# Altium PCB KNX-RELAY-24CH_V1.2.PcbDoc (part 2 of 2)
Units mm, origin at the board's own origin, x right, y up, seen from the top; angles counter-clockwise.
Board outline 85 x 205.5 mm, 2 copper layers (F.Cu, B.Cu); 269 components, 236 nets, 839 pads, 840 vias.
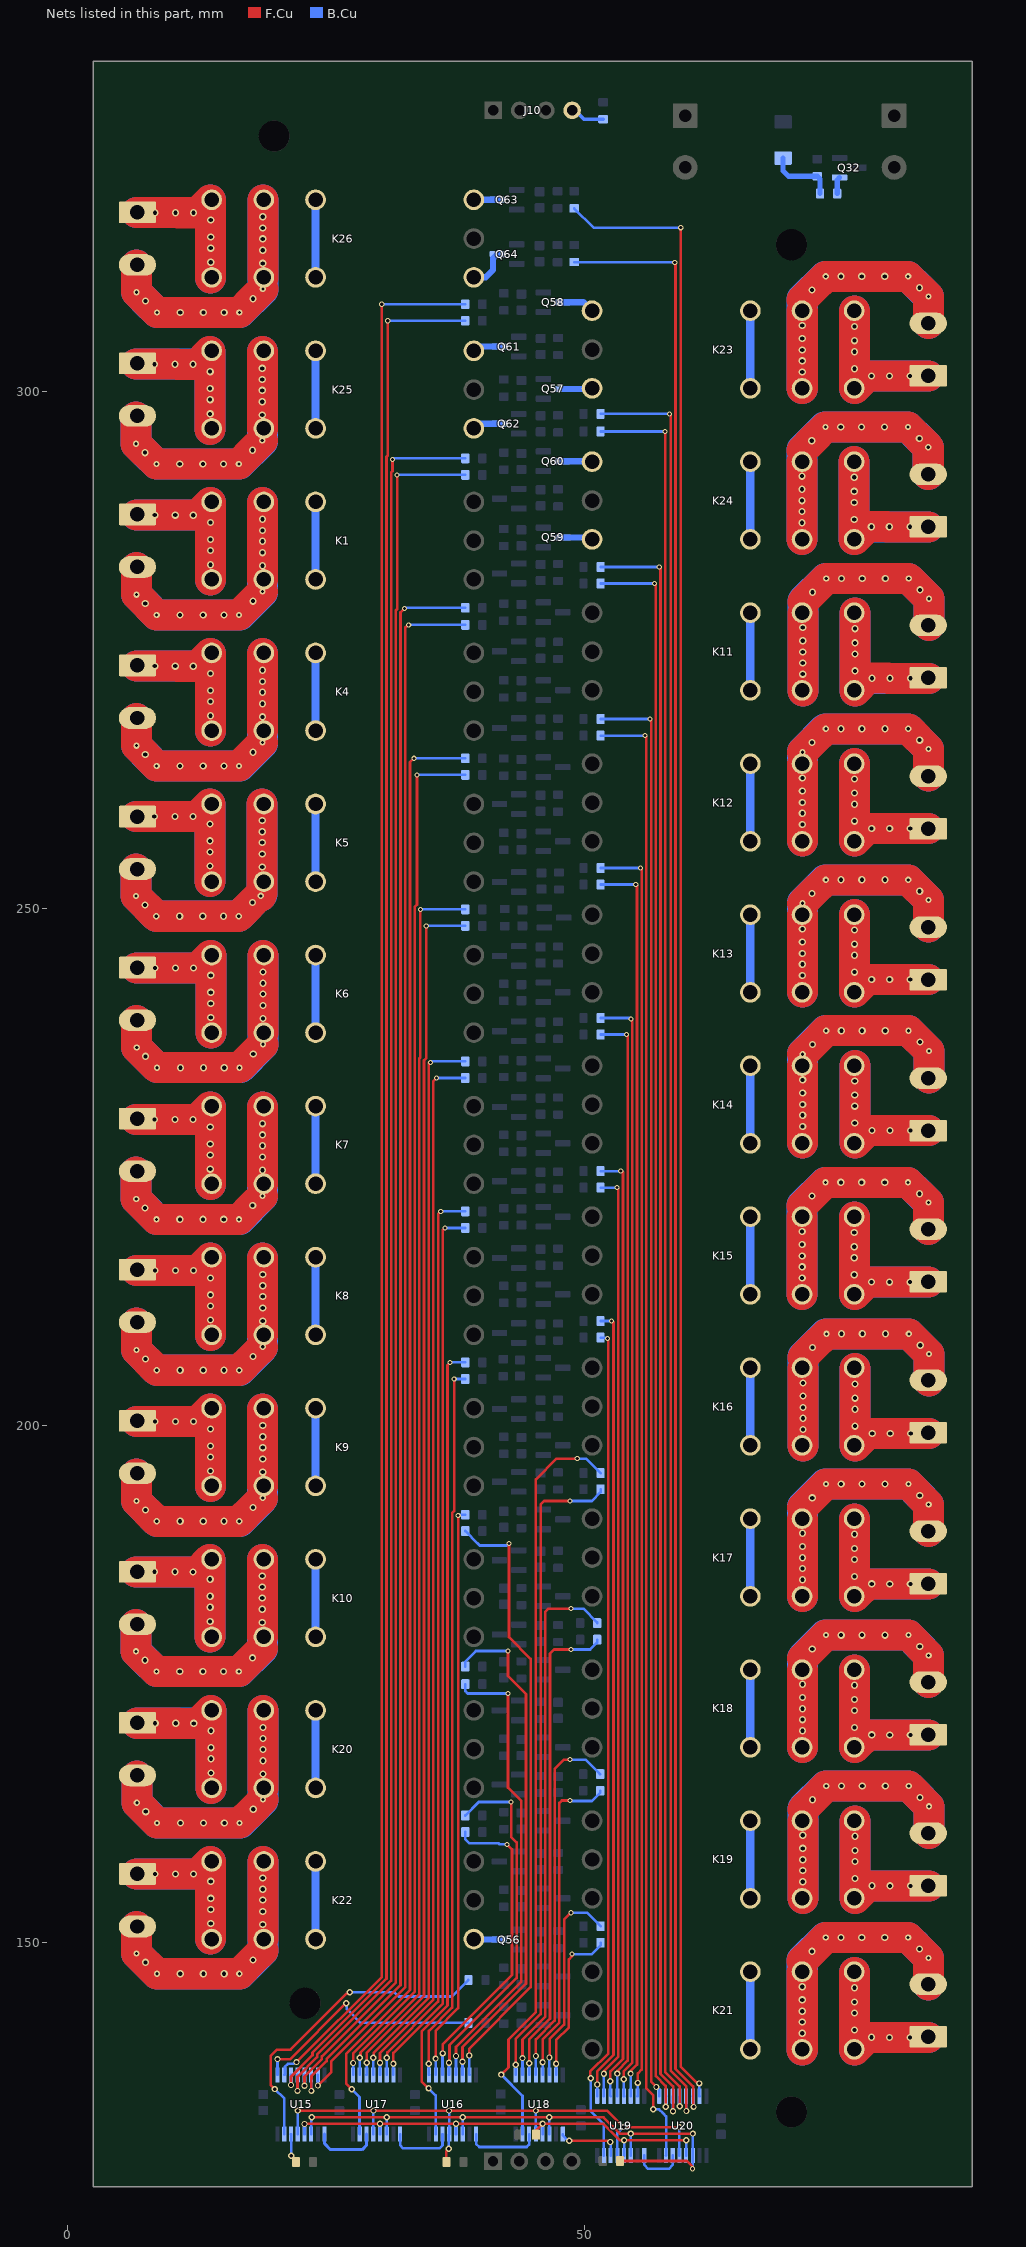
[diagram p2: the nets of this part, all layers, seen from the top]

## Via types
v1: diameter 0.7, hole 0.4, F.Cu to B.Cu, tented both sides, 417 vias
v2: diameter 0.5, hole 0.3, F.Cu to B.Cu, tented both sides, 173 vias
v3: diameter 0.6, hole 0.35, F.Cu to B.Cu, tented both sides, 165 vias
v4: diameter 0.6, hole 0.3, F.Cu to B.Cu, tented both sides, 85 vias

## Nets (pads, with @x,y where several pads share a name; then routed paths per layer and width w, separated by ;. In a path a pad name is that pad's centre, name@x,y a point inside that pad or via, vN(x,y) a via of type N, cw(c..) or ccw(c..) an arc to the next point about the centre after c; other vN are vias at no path point) (continued)
NetK22_A2: K22.A2 Q56.3 | length 2.5
  B.Cu w0.6: K22.A2@39.298,150.35 39.358,150.29 Q56.3@41.761,150.29
NetK23_A1: K23.A1 Q57.3 | length 2.9
  B.Cu w0.6: Q57.3@47.896,300.2 50.668,300.2 K23.A1@50.728,300.26
NetK23_A2: K23.A2 Q58.3 | length 3.2
  B.Cu w0.6: Q58.3@47.896,308.58 49.908,308.58 K23.A2@50.728,307.76
NetK24_A1: K24.A1 Q59.3 | length 2.9
  B.Cu w0.6: Q59.3@47.896,285.84 50.551,285.84 K24.A1@50.728,285.663
NetK24_A2: K24.A2 Q60.3 | length 2.9
  B.Cu w0.6: Q60.3@47.896,293.22 50.671,293.22 K24.A2@50.728,293.163
NetK25_A1: K25.A1 Q61.3 | length 2.6
  B.Cu w0.6: K25.A1@39.298,303.886 39.712,304.3 Q61.3@41.761,304.3
NetK25_A2: K25.A2 Q62.3 | length 2.6
  B.Cu w0.6: K25.A2@39.298,296.386 39.742,296.83 Q62.3@41.761,296.83
NetK26_A1: K26.A1 Q63.3 | length 2.3
  B.Cu w0.6: K26.A1@39.298,318.49 Q63.3@41.571,318.49
NetK26_A2: K26.A2 Q64.3 | length 3.9
  B.Cu w0.6: K26.A2@39.298,310.99 40.448,310.99 41.148,311.69 41.148,312.807 Q64.3@41.571,313.23
NetQ32_1: Q32.1 R85.1 | length 1.6
  B.Cu w0.5: R85.1@74.423,319.09 74.423,320.402 Q32.1@74.661,320.64
NetR84_2: R84.2 R85.2 Z2.2 | length 6.5
  B.Cu w0.5: Z2.2@69.198,322.517 69.198,321.29 69.723,320.765 R84.2@72.498,320.765 72.773,320.49 R85.2@72.773,319.09
NetU15_9: U15.9 U17.14 | length 6.5
  B.Cu w0.3: U15.9@24.873,131.49 24.873,130.565 25.448,129.99 28.498,129.99 28.923,130.415 U17.14@28.923,131.49
NetU16_9: U16.9 U18.14 | length 7.3
  B.Cu w0.254: U16.9@39.523,131.49 39.523,130.54 39.823,130.24 44.398,130.24 44.648,130.49 U18.14@44.648,131.49
NetU16_14: U16.14 U17.9 | length 6.5
  B.Cu w0.254: U17.9@32.173,131.49 32.173,130.415 32.473,130.115 35.998,130.115 36.273,130.39 U16.14@36.273,131.49
NetU18_9: U18.9 U19.14 | length 6.3
  F.Cu w0.254: v3(48.523,130.84) 52.373,130.84 v3(52.486,130.727)
  B.Cu w0.254: U18.9@47.898,131.49 47.898,131.365 48.423,130.84 v3(48.523,130.84) ; v3(52.486,130.727) 52.523,130.69 U19.14@52.523,129.427
NetU19_9: U19.9 U20.14 | length 4.9
  B.Cu w0.254: U19.9@55.773,129.427 55.773,128.515 56.148,128.14 58.148,128.14 58.523,128.515 U20.14@58.523,129.427
R1_A1: R34.2 U15.5 | length 167.1
  F.Cu w0.254: v3(22.923,136.165) 22.923,137.052 24.613,138.742 24.613,138.987 31.76,146.134 31.76,278.794 31.883,278.917 v2(31.883,291.89)
  B.Cu w0.254: v3(22.923,136.165) U15.5@22.923,137.215 ; v2(31.883,291.89) R34.2@38.473,291.89
R1_A2: R33.2 U20.2 | length 153.9
  F.Cu w0.254: v2(56.767,281.39) 56.89,281.267 56.89,137.54 56.89,137.098 57.848,136.14 v3(57.848,134.14)
  B.Cu w0.254: R33.2@51.553,281.39 v2(56.767,281.39) ; v3(57.848,134.14) 57.848,135.127 U20.2@57.873,135.152
R1_COM: J1.2 K1.11 | length 51
  F.Cu w3: J1.2@6.678,282.92 v4(6.678,280.313) v4(8.638,278.353) v4(16.608,278.353) v1(17.938,279.683) v4(18.878,280.623) ; K1.11@18.878,281.71 K1.11@18.878,289.21
  B.Cu w3: J1.2@6.678,282.92 v4(6.678,280.313) ; 7.938,279.043 7.938,279.053 v4(6.678,280.313) ; K1.11@18.878,289.21 v1(18.878,287.603) v1(18.878,286.523) v1(18.878,285.473) v1(18.878,284.373) v1(18.878,283.103) 18.878,281.71 v4(18.878,280.623) 18.878,280.543 16.688,278.353 v4(16.608,278.353) v1(15.138,278.353) v1(13.128,278.353) v1(10.898,278.353) v4(8.638,278.353) v1(7.538,279.453) v4(6.678,280.313)
R1_NC: K1.12 | length 7.5
  B.Cu w0.8: K1.12@23.998,281.783 K1.12@23.998,289.283
R1_NO: J1.1 K1.14 | length 30.3
  F.Cu w3: J1.1@6.678,288 10.651,288 10.658,287.993 v1(12.178,287.993) 12.568,287.993 13.785,289.21 13.838,289.21 K1.14@13.838,281.71
  B.Cu w3: J1.1@6.678,288 v1(8.448,288) v1(10.438,288) 12.628,288 13.838,289.21 v1(13.838,287.283) v1(13.838,285.643) v1(13.838,284.573) v1(13.838,283.203) K1.14@13.838,281.71
R2_A1: R57.2 U15.7 | length 151.4
  F.Cu w0.254: v3(24.223,136.19) 25.521,137.488 25.521,138.549 32.668,145.696 32.668,277.16 32.898,277.39 v2(32.998,277.39)
  B.Cu w0.254: v3(24.223,136.19) U15.7@24.223,137.215 ; v2(32.998,277.39) R57.2@38.473,277.39
R2_A2: R56.2 U20.15 | length 142.8
  F.Cu w0.254: v2(55.859,266.69) 55.982,266.567 55.982,135.906 56.648,135.24 v3(56.648,133.89)
  B.Cu w0.254: R56.2@51.553,266.69 v2(55.859,266.69) ; v3(56.648,133.89) 57.221,133.89 57.221,133.88 57.588,133.513 57.6,133.513 57.898,133.215 57.898,129.452 U20.15@57.873,129.427
R2_COM: J2.2 K4.11 | length 51
  F.Cu w3: J2.2@6.678,268.32 v4(6.678,265.713) v4(8.638,263.753) v4(16.608,263.753) v1(17.938,265.083) v4(18.878,266.023) ; K4.11@18.878,267.11 K4.11@18.878,274.61
  B.Cu w3: J2.2@6.678,268.32 v4(6.678,265.713) ; 7.938,264.443 7.938,264.453 v4(6.678,265.713) ; K4.11@18.878,274.61 v1(18.878,273.003) v1(18.878,271.923) v1(18.878,270.873) v1(18.878,269.773) v1(18.878,268.503) 18.878,267.11 v4(18.878,266.023) 18.878,265.943 16.688,263.753 v4(16.608,263.753) v1(15.138,263.753) v1(13.128,263.753) v1(10.898,263.753) v4(8.638,263.753) v1(7.538,264.853) v4(6.678,265.713)
R2_NC: K4.12 | length 7.5
  B.Cu w0.8: K4.12@23.998,267.179 K4.12@23.998,274.679
R2_NO: J2.1 K4.14 | length 30.3
  F.Cu w3: J2.1@6.678,273.4 10.651,273.4 10.658,273.393 v1(12.178,273.393) 12.568,273.393 13.785,274.61 13.838,274.61 K4.14@13.838,267.11
  B.Cu w3: J2.1@6.678,273.4 v1(8.448,273.4) v1(10.438,273.4) 12.628,273.4 13.838,274.61 v1(13.838,272.683) v1(13.838,271.043) v1(13.838,269.973) v1(13.838,268.603) K4.14@13.838,267.11
R3_A1: R61.2 U17.1 | length 132.9
  F.Cu w0.254: v3(27.623,138.365) 27.623,139.281 33.576,145.234 33.576,250.129 33.798,250.351 v2(33.798,262.89)
  B.Cu w0.254: U17.1@27.623,137.215 v3(27.623,138.365) ; v2(33.798,262.89) R61.2@38.473,262.89
R3_A2: R60.2 U19.6 | length 120.9
  F.Cu w0.254: v3(54.45,137.337) 54.45,137.582 55.074,138.206 55.074,252.167 v2(54.951,252.29)
  B.Cu w0.254: R60.2@51.553,252.29 v2(54.951,252.29) ; v3(54.45,137.337) 54.45,135.175 U19.6@54.473,135.152
R3_COM: J3.2 K5.11 | length 51.2
  F.Cu w3: J3.2@6.638,253.79 v4(6.638,251.183) v4(8.598,249.223) v1(10.858,249.223) v1(13.088,249.223) v1(15.098,249.223) v4(16.568,249.223) 18.838,251.493 v1(18.838,255.243) v1(18.838,256.343) v1(18.838,257.393) v1(18.838,258.473) K5.11@18.838,260.08 ; v4@18.623,251.277 v4(18.7,251.2)
  B.Cu w3: J3.2@6.638,253.79 v4(6.638,251.183) ; 7.898,249.913 7.898,249.923 v4(6.638,251.183) ; v1(17.898,250.553) v4(16.568,249.223) v1(15.098,249.223) v1(13.088,249.223) v1(10.858,249.223) v4(8.598,249.223) v1(7.498,250.323) v4(6.638,251.183) ; v4(18.7,251.2) 18.838,251.338 K5.11@18.838,260.08
  other v1: 18.838,253.973
R3_NC: K5.12 | length 7.5
  B.Cu w0.8: K5.12@23.998,252.575 K5.12@23.998,260.075
R3_NO: J3.1 K5.14 | length 30.3
  F.Cu w3: J3.1@6.638,258.87 10.611,258.87 10.618,258.863 v1(12.138,258.863) 12.528,258.863 13.745,260.08 13.798,260.08 K5.14@13.798,252.58
  B.Cu w3: J3.1@6.638,258.87 v1(8.408,258.87) v1(10.398,258.87) 12.588,258.87 13.798,260.08 v1(13.798,258.153) v1(13.798,256.513) v1(13.798,255.443) v1(13.798,254.073) K5.14@13.798,252.58
R4_A1: R65.2 U17.3 | length 117.2
  F.Cu w0.254: v3(28.936,138.381) 28.936,139.31 34.484,144.858 34.484,235.292 34.698,235.506 v2(34.698,248.29)
  B.Cu w0.254: U17.3@28.923,137.215 28.936,137.228 v3(28.936,138.381) ; v2(34.698,248.29) R65.2@38.473,248.29
R4_A2: R64.2 U19.4 | length 105.6
  F.Cu w0.254: v3(53.17,137.341) 53.17,137.586 54.166,138.582 54.166,237.667 v2(54.043,237.79)
  B.Cu w0.254: R64.2@51.553,237.79 v2(54.043,237.79) ; v3(53.17,137.341) 53.17,135.155 U19.4@53.173,135.152
R4_COM: J4.2 K6.11 | length 51
  F.Cu w3: J4.2@6.708,239.147 v4(6.708,236.54) v4(8.668,234.58) v4(16.638,234.58) v1(17.968,235.91) v4(18.908,236.85) ; K6.11@18.908,237.937 K6.11@18.908,245.437
  B.Cu w3: J4.2@6.708,239.147 v4(6.708,236.54) ; 7.968,235.27 7.968,235.28 v4(6.708,236.54) ; K6.11@18.908,245.437 v1(18.908,243.83) v1(18.908,242.75) v1(18.908,241.7) v1(18.908,240.6) v1(18.908,239.33) 18.908,237.937 v4(18.908,236.85) 18.908,236.77 16.718,234.58 v4(16.638,234.58) v1(15.168,234.58) v1(13.158,234.58) v1(10.928,234.58) v4(8.668,234.58) v1(7.568,235.68) v4(6.708,236.54)
R4_NC: K6.12 | length 7.5
  B.Cu w0.8: K6.12@23.998,237.972 K6.12@23.998,245.472
R4_NO: J4.1 K6.14 | length 30.3
  F.Cu w3: J4.1@6.708,244.227 10.681,244.227 10.688,244.22 v1(12.208,244.22) 12.598,244.22 13.815,245.437 13.868,245.437 K6.14@13.868,237.937
  B.Cu w3: J4.1@6.708,244.227 v1(8.478,244.227) v1(10.468,244.227) 12.658,244.227 13.868,245.437 v1(13.868,243.51) v1(13.868,241.87) v1(13.868,240.8) v1(13.868,239.43) K6.14@13.868,237.937
R5_A1: R69.2 U17.5 | length 101.4
  F.Cu w0.254: v3(30.223,138.39) 30.223,139.313 35.392,144.482 35.392,233.284 v2(35.698,233.59)
  B.Cu w0.254: U17.5@30.223,137.215 v3(30.223,138.39) ; v2(35.698,233.59) R69.2@38.473,233.59
R5_A2: R68.2 U19.2 | length 90
  F.Cu w0.254: v3(51.867,137.322) 51.867,137.567 53.258,138.958 53.258,222.867 v2(53.135,222.99)
  B.Cu w0.254: R68.2@51.553,222.99 v2(53.135,222.99) ; v3(51.867,137.322) 51.867,135.158 U19.2@51.873,135.152
R5_COM: J5.2 K7.11 | length 51
  F.Cu w3: J5.2@6.658,224.49 v4(6.658,221.883) v4(8.618,219.923) v4(16.588,219.923) v1(17.918,221.253) v4(18.858,222.193) ; K7.11@18.858,223.28 K7.11@18.858,230.78
  B.Cu w3: J5.2@6.658,224.49 v4(6.658,221.883) ; 7.918,220.613 7.918,220.623 v4(6.658,221.883) ; K7.11@18.858,230.78 v1(18.858,229.173) v1(18.858,228.093) v1(18.858,227.043) v1(18.858,225.943) v1(18.858,224.673) 18.858,223.28 v4(18.858,222.193) 18.858,222.113 16.668,219.923 v4(16.588,219.923) v1(15.118,219.923) v1(13.108,219.923) v1(10.878,219.923) v4(8.618,219.923) v1(7.518,221.023) v4(6.658,221.883)
R5_NC: K7.12 | length 7.5
  B.Cu w0.8: K7.12@23.998,223.368 K7.12@23.998,230.868
R5_NO: J5.1 K7.14 | length 30.3
  F.Cu w3: J5.1@6.658,229.57 10.631,229.57 10.638,229.563 v1(12.158,229.563) 12.548,229.563 13.765,230.78 13.818,230.78 K7.14@13.818,223.28
  B.Cu w3: J5.1@6.658,229.57 v1(8.428,229.57) v1(10.418,229.57) 12.608,229.57 13.818,230.78 v1(13.818,228.853) v1(13.818,227.213) v1(13.818,226.143) v1(13.818,224.773) K7.14@13.818,223.28
R6_A1: R73.2 U17.7 | length 85.9
  F.Cu w0.254: v3(31.523,138.29) 31.523,139.329 36.3,144.106 36.3,218.892 v2(36.498,219.09)
  B.Cu w0.254: U17.7@31.523,137.215 v3(31.523,138.29) ; v2(36.498,219.09) R73.2@38.473,219.09
R6_A2: R72.2 U19.15 | length 81
  F.Cu w0.254: v3(50.596,136.893) 50.548,136.941 50.548,137.54 52.298,139.29 52.298,208.319 v2(52.227,208.39)
  B.Cu w0.254: v3(50.596,136.893) 50.596,133.742 51.848,132.49 51.848,129.452 U19.15@51.873,129.427 ; R72.2@51.553,208.49 52.127,208.49 v2(52.227,208.39)
R6_COM: J6.2 K8.11 | length 51
  F.Cu w3: J6.2@6.688,209.9 v4(6.688,207.293) v4(8.648,205.333) v4(16.618,205.333) v1(17.948,206.663) v4(18.888,207.603) ; K8.11@18.888,208.69 K8.11@18.888,216.19
  B.Cu w3: J6.2@6.688,209.9 v4(6.688,207.293) ; 7.948,206.023 7.948,206.033 v4(6.688,207.293) ; K8.11@18.888,216.19 v1(18.888,214.583) v1(18.888,213.503) v1(18.888,212.453) v1(18.888,211.353) v1(18.888,210.083) 18.888,208.69 v4(18.888,207.603) 18.888,207.523 16.698,205.333 v4(16.618,205.333) v1(15.148,205.333) v1(13.138,205.333) v1(10.908,205.333) v4(8.648,205.333) v1(7.548,206.433) v4(6.688,207.293)
R6_NC: K8.12 | length 7.5
  B.Cu w0.8: K8.12@23.998,208.764 K8.12@23.998,216.264
R6_NO: J6.1 K8.14 | length 30.3
  F.Cu w3: J6.1@6.688,214.98 10.661,214.98 10.668,214.973 v1(12.188,214.973) 12.578,214.973 13.795,216.19 13.848,216.19 K8.14@13.848,208.69
  B.Cu w3: J6.1@6.688,214.98 v1(8.458,214.98) v1(10.448,214.98) 12.638,214.98 13.848,216.19 v1(13.848,214.263) v1(13.848,212.623) v1(13.848,211.553) v1(13.848,210.183) K8.14@13.848,208.69
R7_A1: R77.2 U16.1 | length 69.4
  F.Cu w0.254: v3(34.948,138.29) 34.948,141.47 37.208,143.73 37.208,191.529 37.398,191.719 v2(37.398,204.49)
  B.Cu w0.254: v3(34.948,138.29) 34.948,137.24 U16.1@34.973,137.215 ; v2(37.398,204.49) R77.2@38.473,204.49
R7_A2: R76.2 U18.1 | length 62.7
  F.Cu w0.254: v3(43.348,138.19) 43.348,140.69 45.752,143.094 45.752,143.79 45.752,192.344 46.098,192.69 v2(48.598,192.69)
  B.Cu w0.254: U18.1@43.348,137.215 v3(43.348,138.19) ; v2(48.598,192.69) 50.698,192.69 51.553,193.545 R76.2@51.553,193.83
R7_COM: J7.2 K9.11 | length 51
  F.Cu w3: J7.2@6.688,195.3 v4(6.688,192.693) v4(8.648,190.733) v4(16.618,190.733) v1(17.948,192.063) v4(18.888,193.003) ; K9.11@18.888,194.09 K9.11@18.888,201.59
  B.Cu w3: J7.2@6.688,195.3 v4(6.688,192.693) ; 7.948,191.423 7.948,191.433 v4(6.688,192.693) ; K9.11@18.888,201.59 v1(18.888,199.983) v1(18.888,198.903) v1(18.888,197.853) v1(18.888,196.753) v1(18.888,195.483) 18.888,194.09 v4(18.888,193.003) 18.888,192.923 16.698,190.733 v4(16.618,190.733) v1(15.148,190.733) v1(13.138,190.733) v1(10.908,190.733) v4(8.648,190.733) v1(7.548,191.833) v4(6.688,192.693)
R7_NC: K9.12 | length 7.5
  B.Cu w0.8: K9.12@23.998,194.161 K9.12@23.998,201.661
R7_NO: J7.1 K9.14 | length 30.3
  F.Cu w3: J7.1@6.688,200.38 10.661,200.38 10.668,200.373 v1(12.188,200.373) 12.578,200.373 13.795,201.59 13.848,201.59 K9.14@13.848,194.09
  B.Cu w3: J7.1@6.688,200.38 v1(8.458,200.38) v1(10.448,200.38) 12.638,200.38 13.848,201.59 v1(13.848,199.663) v1(13.848,198.023) v1(13.848,196.953) v1(13.848,195.583) K9.14@13.848,194.09
R8_A1: R81.2 U16.7 | length 59.6
  F.Cu w0.254: v3(38.848,139.09) 38.848,139.74 44.798,145.69 44.798,177.44 42.698,179.54 v2(42.698,188.59)
  B.Cu w0.254: R81.2@38.473,189.79 39.673,188.59 ; v3(38.848,139.09) 38.848,137.24 U16.7@38.873,137.215
  B.Cu w0.3: 39.673,188.59 39.873,188.39 42.498,188.39 v2(42.698,188.59)
R8_A2: R80.2 U18.3 | length 46.8
  F.Cu w0.254: v3(44.648,138.34) 44.648,140.64 46.66,142.652 46.66,177.952 47.048,178.34 v2(48.698,178.34)
  B.Cu w0.254: U18.3@44.648,137.215 v3(44.648,138.34) ; v2(48.698,178.34) 50.548,178.34 51.223,179.015 R80.2@51.223,179.29
R8_COM: J8.2 K10.11 | length 51
  F.Cu w3: J8.2@6.648,180.77 v4(6.648,178.163) v4(8.608,176.203) v4(16.578,176.203) v1(17.908,177.533) 18.848,178.473 ; K10.11@18.848,179.56 K10.11@18.848,187.06
  B.Cu w3: J8.2@6.648,180.77 v4(6.648,178.163) ; 7.908,176.893 7.908,176.903 v4(6.648,178.163) ; K10.11@18.848,187.06 v1(18.848,185.453) v1(18.848,184.373) v1(18.848,183.323) v1(18.848,182.223) v1(18.848,180.953) 18.848,179.56 18.848,178.473 18.848,178.393 16.658,176.203 v4(16.578,176.203) v1(15.108,176.203) v1(13.098,176.203) v1(10.868,176.203) v4(8.608,176.203) v1(7.508,177.303) v4(6.648,178.163)
R8_NC: K10.12 | length 7.5
  B.Cu w0.8: K10.12@23.998,179.557 K10.12@23.998,187.057
R8_NO: J8.1 K10.14 | length 30.3
  F.Cu w3: J8.1@6.648,185.85 10.621,185.85 10.628,185.843 v1(12.148,185.843) 12.538,185.843 13.755,187.06 13.808,187.06 K10.14@13.808,179.56
  B.Cu w3: J8.1@6.648,185.85 v1(8.418,185.85) v1(10.408,185.85) 12.598,185.85 13.808,187.06 v1(13.808,185.133) v1(13.808,183.493) v1(13.808,182.423) v1(13.808,181.053) K10.14@13.808,179.56
R9_A1: R93.2 U20.1 | length 138.3
  F.Cu w0.254: v2(56.313,268.29) 56.436,268.167 56.436,137.04 56.436,136.552 v3(56.948,136.04)
  B.Cu w0.254: R93.2@51.553,268.29 v2(56.313,268.29) ; v3(56.948,136.04) 57.223,135.765 U20.1@57.223,135.152
R9_A2: R91.2 U15.6 | length 154.5
  F.Cu w0.254: v3(23.596,135.665) 23.596,136.841 23.6,136.845 23.6,137.087 25.067,138.554 25.067,138.738 32.214,145.885 32.214,278.606 v2(32.598,278.99)
  B.Cu w0.254: U15.6@23.573,137.215 23.573,135.688 v3(23.596,135.665) ; v2(32.598,278.99) 32.648,279.04 R91.2@38.473,279.04
R9_COM: J11.2 K11.11 | length 51
  F.Cu w3: K11.11@71.098,271.02 K11.11@71.098,278.52 ; 71.098,279.607 v1(72.038,280.547) v4(73.368,281.877) v4(81.338,281.877) v4(83.298,279.917) J11.2@83.298,277.31
  B.Cu w3: K11.11@71.098,271.02 v1(71.098,272.627) v1(71.098,273.707) v1(71.098,274.757) v1(71.098,275.857) v1(71.098,277.127) 71.098,278.52 71.098,279.607 71.098,279.687 73.288,281.877 v4(73.368,281.877) v1(74.838,281.877) v1(76.848,281.877) v1(79.078,281.877) v4(81.338,281.877) v1(82.438,280.777) v4(83.298,279.917) ; 82.038,281.187 82.038,281.177 v4(83.298,279.917) ; J11.2@83.298,277.31 v4(83.298,279.917)
R9_NC: K11.12 | length 7.5
  B.Cu w0.8: K11.12@66.028,271.065 K11.12@66.028,278.565
R9_NO: J11.1 K11.14 | length 30.3
  F.Cu w3: K11.14@76.138,278.52 76.138,271.02 76.191,271.02 77.408,272.237 v1(77.798,272.237) 79.318,272.237 79.325,272.23 J11.1@83.298,272.23
  B.Cu w3: K11.14@76.138,278.52 v1(76.138,277.027) v1(76.138,275.657) v1(76.138,274.587) v1(76.138,272.947) 76.138,271.02 77.348,272.23 v1(79.538,272.23) v1(81.528,272.23) J11.1@83.298,272.23
R10_A1: R94.2 U19.7 | length 122.8
  F.Cu w0.254: v3(55.148,136.44) 55.148,137.36 55.528,137.74 55.528,253.767 v2(55.405,253.89)
  B.Cu w0.254: R94.2@51.553,253.89 v2(55.405,253.89) ; U19.7@55.123,135.152 55.148,135.177 v3(55.148,136.44)
R10_A2: R92.2 U17.15 | length 141.2
  F.Cu w0.254: v3(27.486,135.827) 26.973,136.34 26.973,139.273 33.122,145.422 33.122,146.74 33.122,264.114 v2(33.498,264.49)
  B.Cu w0.254: v3(27.486,135.827) 28.248,135.065 28.248,131.515 U17.15@28.273,131.49 ; v2(33.498,264.49) R92.2@38.473,264.49
R10_COM: J12.2 K12.11 | length 51
  F.Cu w3: K12.11@71.058,256.49 K12.11@71.058,263.99 ; v4(71.058,265.077) v1(71.998,266.017) v4(73.328,267.347) v4(81.298,267.347) v4(83.258,265.387) J12.2@83.258,262.78
  B.Cu w3: K12.11@71.058,256.49 v1(71.058,258.097) v1(71.058,259.177) v1(71.058,260.227) v1(71.058,261.327) v1(71.058,262.597) 71.058,263.99 v4(71.058,265.077) 71.058,265.157 73.248,267.347 v4(73.328,267.347) v1(74.798,267.347) v1(76.808,267.347) v1(79.038,267.347) v4(81.298,267.347) v1(82.398,266.247) v4(83.258,265.387) ; 81.998,266.657 81.998,266.647 v4(83.258,265.387) ; J12.2@83.258,262.78 v4(83.258,265.387)
R10_NC: K12.12 | length 7.5
  B.Cu w0.8: K12.12@66.028,256.468 K12.12@66.028,263.968
R10_NO: J12.1 K12.14 | length 30.3
  F.Cu w3: K12.14@76.098,263.99 76.098,256.49 76.151,256.49 77.368,257.707 v1(77.758,257.707) 79.278,257.707 79.285,257.7 J12.1@83.258,257.7
  B.Cu w3: K12.14@76.098,263.99 v1(76.098,262.497) v1(76.098,261.127) v1(76.098,260.057) v1(76.098,258.417) 76.098,256.49 77.308,257.7 v1(79.498,257.7) v1(81.488,257.7) J12.1@83.258,257.7
R11_A1: R100.2 U19.5 | length 107.5
  F.Cu w0.254: v3(53.797,136.789) 53.797,137.571 54.62,138.394 54.62,239.167 v2(54.497,239.29)
  B.Cu w0.254: R100.2@51.553,239.39 54.397,239.39 v2(54.497,239.29) ; v3(53.797,136.789) 53.797,135.178 U19.5@53.823,135.152
R11_A2: R99.2 U17.2 | length 119.4
  F.Cu w0.254: v3(28.273,138.865) 28.339,138.931 28.339,139.355 34.03,145.046 34.03,235.48 34.121,235.571 34.121,249.858 v2(34.153,249.89)
  B.Cu w0.254: U17.2@28.273,137.215 v3(28.273,138.865) ; v2(34.153,249.89) R99.2@38.473,249.89
R11_COM: J13.2 K13.11 | length 51
  F.Cu w3: K13.11@71.058,241.89 K13.11@71.058,249.39 ; v4(71.058,250.477) v1(71.998,251.417) v4(73.328,252.747) v4(81.298,252.747) v4(83.258,250.787) J13.2@83.258,248.18
  B.Cu w3: K13.11@71.058,241.89 v1(71.058,243.497) v1(71.058,244.577) v1(71.058,245.627) v1(71.058,246.727) v1(71.058,247.997) 71.058,249.39 v4(71.058,250.477) 71.058,250.557 73.248,252.747 v4(73.328,252.747) v1(74.798,252.747) v1(76.808,252.747) v1(79.038,252.747) v4(81.298,252.747) v1(82.398,251.647) v4(83.258,250.787) ; 81.998,252.057 81.998,252.047 v4(83.258,250.787) ; J13.2@83.258,248.18 v4(83.258,250.787)
R11_NC: K13.12 | length 7.5
  B.Cu w0.8: K13.12@66.028,241.871 K13.12@66.028,249.371
R11_NO: J13.1 K13.14 | length 30.3
  F.Cu w3: K13.14@76.098,249.39 76.098,241.89 76.151,241.89 77.368,243.107 v1(77.758,243.107) 79.278,243.107 79.285,243.1 J13.1@83.258,243.1
  B.Cu w3: K13.14@76.098,249.39 v1(76.098,247.897) v1(76.098,246.527) v1(76.098,245.457) v1(76.098,243.817) 76.098,241.89 77.308,243.1 v1(79.498,243.1) v1(81.488,243.1) J13.1@83.258,243.1
R12_A1: R104.2 U19.3 | length 92
  F.Cu w0.254: v3(52.494,136.59) 52.494,137.063 52.494,137.552 53.712,138.77 53.712,138.84 53.712,224.476 53.598,224.59 v2(53.498,224.59)
  B.Cu w0.254: R104.2@51.553,224.59 v2(53.498,224.59) ; v3(52.494,136.59) 52.494,135.181 U19.3@52.523,135.152
R12_A2: R103.2 U17.4 | length 103.6
  F.Cu w0.254: v3(29.573,138.865) 29.639,138.931 29.639,139.371 34.938,144.67 34.938,235.03 34.998,235.09 v2(35.098,235.09)
  B.Cu w0.254: U17.4@29.573,137.215 v3(29.573,138.865) ; v2(35.098,235.09) 35.198,235.19 R103.2@38.473,235.19
R12_COM: J14.2 K14.11 | length 51
  F.Cu w3: K14.11@71.088,227.3 K14.11@71.088,234.8 ; v4(71.088,235.887) v1(72.028,236.827) v4(73.358,238.157) v4(81.328,238.157) v4(83.288,236.197) J14.2@83.288,233.59
  B.Cu w3: K14.11@71.088,227.3 v1(71.088,228.907) v1(71.088,229.987) v1(71.088,231.037) v1(71.088,232.137) v1(71.088,233.407) 71.088,234.8 v4(71.088,235.887) 71.088,235.967 73.278,238.157 v4(73.358,238.157) v1(74.828,238.157) v1(76.838,238.157) v1(79.068,238.157) v4(81.328,238.157) v1(82.428,237.057) v4(83.288,236.197) ; 82.028,237.467 82.028,237.457 v4(83.288,236.197) ; J14.2@83.288,233.59 v4(83.288,236.197)
R12_NC: K14.12 | length 7.5
  B.Cu w0.8: K14.12@66.028,227.273 K14.12@66.028,234.773
R12_NO: J14.1 K14.14 | length 30.3
  F.Cu w3: K14.14@76.128,234.8 76.128,227.3 76.181,227.3 77.398,228.517 v1(77.788,228.517) 79.308,228.517 79.315,228.51 J14.1@83.288,228.51
  B.Cu w3: K14.14@76.128,234.8 v1(76.128,233.307) v1(76.128,231.937) v1(76.128,230.867) v1(76.128,229.227) 76.128,227.3 77.338,228.51 v1(79.528,228.51) v1(81.518,228.51) J14.1@83.288,228.51
R13_A1: R108.2 U19.1 | length 76.8
  F.Cu w0.254: v3(51.223,136.29) 51.223,137.565 52.804,139.146 52.804,209.984 52.698,210.09 v2(52.598,210.09)
  B.Cu w0.254: U19.1@51.223,135.152 v3(51.223,136.29) ; R108.2@51.553,210.09 v2(52.598,210.09)
R13_A2: R107.2 U17.6 | length 88
  F.Cu w0.254: v3(30.873,138.865) 30.939,138.931 30.939,139.387 35.846,144.294 35.846,220.438 v2(36.098,220.69)
  B.Cu w0.254: U17.6@30.873,137.215 v3(30.873,138.865) ; v2(36.098,220.69) R107.2@38.473,220.69
R13_COM: J15.2 K15.11 | length 51
  F.Cu w3: K15.11@71.038,212.643 K15.11@71.038,220.143 ; 71.038,221.23 v1(71.978,222.17) v4(73.308,223.5) v4(81.278,223.5) v4(83.238,221.54) J15.2@83.238,218.933
  B.Cu w3: K15.11@71.038,212.643 v1(71.038,214.25) v1(71.038,215.33) v1(71.038,216.38) v1(71.038,217.48) v1(71.038,218.75) 71.038,220.143 71.038,221.23 71.038,221.31 73.228,223.5 v4(73.308,223.5) v1(74.778,223.5) v1(76.788,223.5) v1(79.018,223.5) v4(81.278,223.5) v1(82.378,222.4) v4(83.238,221.54) ; 81.978,222.81 81.978,222.8 v4(83.238,221.54) ; J15.2@83.238,218.933 v4(83.238,221.54)
R13_NC: K15.12 | length 7.5
  B.Cu w0.8: K15.12@66.028,212.676 K15.12@66.028,220.176
R13_NO: J15.1 K15.14 | length 30.3
  F.Cu w3: K15.14@76.078,220.143 76.078,212.643 76.131,212.643 77.348,213.86 v1(77.738,213.86) 79.258,213.86 79.265,213.853 J15.1@83.238,213.853
  B.Cu w3: K15.14@76.078,220.143 v1(76.078,218.65) v1(76.078,217.28) v1(76.078,216.21) v1(76.078,214.57) 76.078,212.643 77.288,213.853 v1(79.478,213.853) v1(81.468,213.853) J15.1@83.238,213.853
R14_A1: R112.2 U18.15 | length 73.2
  F.Cu w0.254: v3(41.948,137.24) 42.648,137.94 42.648,140.64 45.298,143.29 45.298,194.79 47.298,196.79 v2(49.298,196.79)
  B.Cu w0.254: v3(41.948,137.24) 43.998,135.19 U18.15@43.998,131.49 ; v2(49.298,196.79) 50.153,196.79 R112.2@51.553,195.39
R14_A2: R111.2 U16.15 | length 77.8
  F.Cu w0.254: v3(34.923,135.915) 34.248,136.59 34.248,141.412 36.754,143.918 36.754,205.846 v2(36.998,206.09)
  B.Cu w0.254: v3(34.923,135.915) 35.598,135.24 35.598,131.515 U16.15@35.623,131.49 ; v2(36.998,206.09) R111.2@38.473,206.09
R14_COM: J16.2 K16.11 | length 51
  F.Cu w3: K16.11@71.108,198 K16.11@71.108,205.5 ; 71.108,206.587 v1(72.048,207.527) v4(73.378,208.857) v4(81.348,208.857) v4(83.308,206.897) J16.2@83.308,204.29
  B.Cu w3: K16.11@71.108,198 v1(71.108,199.607) v1(71.108,200.687) v1(71.108,201.737) v1(71.108,202.837) v1(71.108,204.107) 71.108,205.5 71.108,206.587 71.108,206.667 73.298,208.857 v4(73.378,208.857) v1(74.848,208.857) v1(76.858,208.857) v1(79.088,208.857) v4(81.348,208.857) v1(82.448,207.757) v4(83.308,206.897) ; 82.048,208.167 82.048,208.157 v4(83.308,206.897) ; J16.2@83.308,204.29 v4(83.308,206.897)
R14_NC: K16.12 | length 7.5
  B.Cu w0.8: K16.12@66.028,198.079 K16.12@66.028,205.579
R14_NO: J16.1 K16.14 | length 30.3
  F.Cu w3: K16.14@76.148,205.5 76.148,198 76.201,198 77.418,199.217 v1(77.808,199.217) 79.328,199.217 79.335,199.21 J16.1@83.308,199.21
  B.Cu w3: K16.14@76.148,205.5 v1(76.148,204.007) v1(76.148,202.637) v1(76.148,201.567) v1(76.148,199.927) 76.148,198 77.358,199.21 v1(79.548,199.21) v1(81.538,199.21) J16.1@83.308,199.21
R15_A1: R116.2 U18.2 | length 51.5
  F.Cu w0.254: v3(43.998,138.84) 43.998,140.64 46.206,142.848 46.206,143.69 46.206,181.998 46.498,182.29 v2(48.698,182.29)
  B.Cu w0.254: U18.2@43.998,137.215 v3(43.998,138.84) ; v2(48.698,182.29) 49.898,182.29 51.223,180.965 R116.2@51.223,180.89
R15_A2: R115.2 U16.2 | length 55.7
  F.Cu w0.254: v3(35.598,138.79) 35.598,141.478 37.785,143.665 v2(37.785,191.29)
  B.Cu w0.254: v3(35.598,138.79) 35.598,137.24 U16.2@35.623,137.215 ; v2(37.785,191.29) 37.855,191.36 R115.2@38.473,191.36
R15_COM: J17.2 K17.11 | length 51
  F.Cu w3: K17.11@71.068,183.47 K17.11@71.068,190.97 ; 71.068,192.057 v1(72.008,192.997) v4(73.338,194.327) v4(81.308,194.327) v4(83.268,192.367) J17.2@83.268,189.76
  B.Cu w3: K17.11@71.068,183.47 v1(71.068,185.077) v1(71.068,186.157) v1(71.068,187.207) v1(71.068,188.307) v1(71.068,189.577) 71.068,190.97 71.068,192.057 71.068,192.137 73.258,194.327 v4(73.338,194.327) v1(74.808,194.327) v1(76.818,194.327) v1(79.048,194.327) v4(81.308,194.327) v1(82.408,193.227) v4(83.268,192.367) ; 82.008,193.637 82.008,193.627 v4(83.268,192.367) ; J17.2@83.268,189.76 v4(83.268,192.367)
R15_NC: K17.12 | length 7.5
  B.Cu w0.8: K17.12@66.028,183.482 K17.12@66.028,190.982
R15_NO: J17.1 K17.14 | length 30.3
  F.Cu w3: K17.14@76.108,190.97 76.108,183.47 76.161,183.47 77.378,184.687 v1(77.768,184.687) 79.288,184.687 79.295,184.68 J17.1@83.268,184.68
  B.Cu w3: K17.14@76.108,190.97 v1(76.108,189.477) v1(76.108,188.107) v1(76.108,187.037) v1(76.108,185.397) 76.108,183.47 77.318,184.68 v1(79.508,184.68) v1(81.498,184.68) J17.1@83.268,184.68
R16_A1: R120.2 U18.4 | length 35.7
  F.Cu w0.254: v3(45.298,139.04) 45.298,140.64 47.114,142.456 47.114,143.04 47.114,166.79 48.014,167.69 v2(48.598,167.69)
  B.Cu w0.254: U18.4@45.298,137.215 v3(45.298,139.04) ; v2(48.598,167.69) 50.098,167.69 51.498,166.29 R120.2@51.523,166.29
R16_A2: R119.2 U16.6 | length 49.3
  F.Cu w0.254: v3(38.202,138.49) 38.202,139.894 44.344,146.036 44.344,174.04 42.598,175.786 v2(42.598,178.19)
  B.Cu w0.254: v3(38.202,138.49) 38.202,137.236 U16.6@38.223,137.215 ; R119.2@38.473,176.69 38.473,177.165 39.498,178.19 v2(42.598,178.19)
R16_COM: J18.2 K18.11 | length 51
  F.Cu w3: K18.11@71.068,168.87 K18.11@71.068,176.37 ; 71.068,177.457 v1(72.008,178.397) v4(73.338,179.727) v4(81.308,179.727) v4(83.268,177.767) J18.2@83.268,175.16
  B.Cu w3: K18.11@71.068,168.87 v1(71.068,170.477) v1(71.068,171.557) v1(71.068,172.607) v1(71.068,173.707) v1(71.068,174.977) 71.068,176.37 71.068,177.457 71.068,177.537 73.258,179.727 v4(73.338,179.727) v1(74.808,179.727) v1(76.818,179.727) v1(79.048,179.727) v4(81.308,179.727) v1(82.408,178.627) v4(83.268,177.767) ; 82.008,179.037 82.008,179.027 v4(83.268,177.767) ; J18.2@83.268,175.16 v4(83.268,177.767)
R16_NC: K18.12 | length 7.5
  B.Cu w0.8: K18.12@66.028,168.884 K18.12@66.028,176.384
R16_NO: J18.1 K18.14 | length 30.3
  F.Cu w3: K18.14@76.108,176.37 76.108,168.87 76.161,168.87 77.378,170.087 v1(77.768,170.087) 79.288,170.087 79.295,170.08 J18.1@83.268,170.08
  B.Cu w3: K18.14@76.108,176.37 v1(76.108,174.877) v1(76.108,173.507) v1(76.108,172.437) v1(76.108,170.797) 76.108,168.87 77.318,170.08 v1(79.508,170.08) v1(81.498,170.08) J18.1@83.268,170.08
R17_A1: R124.2 U18.6 | length 19.9
  F.Cu w0.254: v3(46.606,138.895) 46.623,138.912 46.623,140.665 48.022,142.064 48.022,142.39 48.022,152.214 v2(48.698,152.89)
  B.Cu w0.254: U18.6@46.598,137.215 46.606,137.223 v3(46.606,138.895) ; v2(48.698,152.89) 50.253,152.89 R124.2@51.553,151.59
R17_A2: R123.2 U16.4 | length 34.3
  F.Cu w0.254: v3(36.9,138.39) 36.948,138.438 36.948,140.09 43.436,146.578 43.436,159.69 42.898,160.228 v2(42.898,163.59)
  B.Cu w0.254: v3(36.9,138.39) 36.9,137.238 U16.4@36.923,137.215 ; R123.2@38.473,162.29 39.773,163.59 v2(42.898,163.59)
R17_COM: J19.2 K19.11 | length 51
  F.Cu w3: K19.11@71.098,154.28 K19.11@71.098,161.78 ; 71.098,162.867 v1(72.038,163.807) v4(73.368,165.137) v4(81.338,165.137) v4(83.298,163.177) J19.2@83.298,160.57
  B.Cu w3: K19.11@71.098,154.28 v1(71.098,155.887) v1(71.098,156.967) v1(71.098,158.017) v1(71.098,159.117) v1(71.098,160.387) 71.098,161.78 71.098,162.867 71.098,162.947 73.288,165.137 v4(73.368,165.137) v1(74.838,165.137) v1(76.848,165.137) v1(79.078,165.137) v4(81.338,165.137) v1(82.438,164.037) v4(83.298,163.177) ; 82.038,164.447 82.038,164.437 v4(83.298,163.177) ; J19.2@83.298,160.57 v4(83.298,163.177)
R17_NC: K19.12 | length 7.5
  B.Cu w0.8: K19.12@66.028,154.287 K19.12@66.028,161.787
R17_NO: J19.1 K19.14 | length 30.3
  F.Cu w3: K19.14@76.138,161.78 76.138,154.28 76.191,154.28 77.408,155.497 v1(77.798,155.497) 79.318,155.497 79.325,155.49 J19.1@83.298,155.49
  B.Cu w3: K19.14@76.138,161.78 v1(76.138,160.287) v1(76.138,158.917) v1(76.138,157.847) v1(76.138,156.207) 76.138,154.28 77.348,155.49 v1(79.538,155.49) v1(81.528,155.49) J19.1@83.298,155.49
R18_A1: R128.2 U16.5 | length 44.9
  F.Cu w0.254: v3(37.575,139.04) 37.575,139.917 43.89,146.232 43.89,163.69 42.598,164.982 v2(42.598,174.09)
  B.Cu w0.254: U16.5@37.573,137.215 U16.5@37.573,137.215 v3(37.575,139.04) ; R128.2@38.473,174.99 38.473,174.315 38.698,174.09 v2(42.598,174.09)
R18_A2: R127.2 U18.5 | length 31.6
  F.Cu w0.254: v3(45.948,138.44) 45.948,140.64 47.568,142.26 47.568,163.51 47.798,163.74 v2(48.598,163.74)
  B.Cu w0.254: U18.5@45.948,137.215 v3(45.948,138.44) ; v2(48.598,163.74) 48.748,163.74 48.798,163.69 50.698,163.69 51.523,164.515 R127.2@51.523,164.69
R18_COM: J20.2 K20.11 | length 51
  F.Cu w3: J20.2@6.718,166.127 v4(6.718,163.52) v4(8.678,161.56) v4(16.648,161.56) v1(17.978,162.89) v4(18.918,163.83) ; K20.11@18.918,164.917 K20.11@18.918,172.417
  B.Cu w3: J20.2@6.718,166.127 v4(6.718,163.52) ; 7.978,162.25 7.978,162.26 v4(6.718,163.52) ; K20.11@18.918,172.417 v1(18.918,170.81) v1(18.918,169.73) v1(18.918,168.68) v1(18.918,167.58) v1(18.918,166.31) 18.918,164.917 v4(18.918,163.83) 18.918,163.75 16.728,161.56 v4(16.648,161.56) v1(15.178,161.56) v1(13.168,161.56) v1(10.938,161.56) v4(8.678,161.56) v1(7.578,162.66) v4(6.718,163.52)
R18_NC: K20.12 | length 7.5
  B.Cu w0.8: K20.12@23.998,164.953 K20.12@23.998,172.453
R18_NO: J20.1 K20.14 | length 30.3
  F.Cu w3: J20.1@6.718,171.207 10.691,171.207 10.698,171.2 v1(12.218,171.2) 12.608,171.2 13.825,172.417 13.878,172.417 K20.14@13.878,164.917
  B.Cu w3: J20.1@6.718,171.207 v1(8.488,171.207) v1(10.478,171.207) 12.668,171.207 13.878,172.417 v1(13.878,170.49) v1(13.878,168.85) v1(13.878,167.78) v1(13.878,166.41) K20.14@13.878,164.917
R19_A1: R132.2 U15.1 | length 23.3
  F.Cu w0.254: v3(20.323,138.74) 21.553,138.74 v3(26.957,144.143)
  B.Cu w0.254: U15.1@20.323,137.215 v3(20.323,138.74) ; v3(26.957,144.143) 27.023,144.077 27.023,143.577 28.36,142.24 R132.2@38.773,142.24
R19_A2: R131.2 U15.15 | length 30.6
  F.Cu w0.254: v3(20.048,135.84) 19.648,136.24 19.648,139.048 20.248,139.648 21.575,139.648 26.986,145.059 27.066,145.059 27.206,145.2 v3(27.3,145.2)
  B.Cu w0.254: v3(20.048,135.84) 20.973,134.915 U15.15@20.973,131.49 ; v3(27.3,145.2) 31.643,145.2 32.054,144.79 37.173,144.79 R131.2@38.773,146.39
R19_COM: J21.2 K21.11 | length 51
  F.Cu w3: K21.11@71.048,139.63 K21.11@71.048,147.13 ; 71.048,148.217 v1(71.988,149.157) v4(73.318,150.487) v4(81.288,150.487) v4(83.248,148.527) J21.2@83.248,145.92
  B.Cu w3: K21.11@71.048,139.63 v1(71.048,141.237) v1(71.048,142.317) v1(71.048,143.367) v1(71.048,144.467) v1(71.048,145.737) 71.048,147.13 71.048,148.217 71.048,148.297 73.238,150.487 v4(73.318,150.487) v1(74.788,150.487) v1(76.798,150.487) v1(79.028,150.487) v4(81.288,150.487) v1(82.388,149.387) v4(83.248,148.527) ; 81.988,149.797 81.988,149.787 v4(83.248,148.527) ; J21.2@83.248,145.92 v4(83.248,148.527)
R19_NC: K21.12 | length 7.5
  B.Cu w0.8: K21.12@66.028,139.69 K21.12@66.028,147.19
R19_NO: J21.1 K21.14 | length 30.3
  F.Cu w3: K21.14@76.088,147.13 76.088,139.63 76.141,139.63 77.358,140.847 v1(77.748,140.847) 79.268,140.847 79.275,140.84 J21.1@83.248,140.84
  B.Cu w3: K21.14@76.088,147.13 v1(76.088,145.637) v1(76.088,144.267) v1(76.088,143.197) v1(76.088,141.557) 76.088,139.63 77.298,140.84 v1(79.488,140.84) v1(81.478,140.84) J21.1@83.248,140.84
R20_A1: R136.2 U16.3 | length 30.2
  F.Cu w0.254: v3(36.298,139.29) 36.298,140.19 42.982,146.874 42.982,159.018 v2(42.5,159.5)
  B.Cu w0.254: U16.3@36.273,137.215 36.273,139.265 v3(36.298,139.29) ; R136.2@38.473,160.69 38.473,159.99 38.873,159.59 41.698,159.59 41.788,159.5 v2(42.5,159.5)
R20_A2: R135.2 U18.7 | length 15.7
  F.Cu w0.254: v3(47.248,138.29) 47.248,140.59 48.476,141.818 48.476,141.94 48.476,148.368 48.798,148.69 v2(48.798,148.89)
  B.Cu w0.254: U18.7@47.248,137.215 v3(47.248,138.29) ; v2(48.798,148.89) 50.698,148.89 51.553,149.745 R135.2@51.553,149.99
R20_COM: J22.2 K22.11 | length 51
  F.Cu w3: J22.2@6.698,151.56 v4(6.698,148.953) v4(8.658,146.993) v4(16.628,146.993) v1(17.958,148.323) 18.898,149.263 ; K22.11@18.898,150.35 K22.11@18.898,157.85
  B.Cu w3: J22.2@6.698,151.56 v4(6.698,148.953) ; 7.958,147.683 7.958,147.693 v4(6.698,148.953) ; K22.11@18.898,157.85 v1(18.898,156.243) v1(18.898,155.163) v1(18.898,154.113) v1(18.898,153.013) v1(18.898,151.743) 18.898,150.35 18.898,149.263 18.898,149.183 16.708,146.993 v4(16.628,146.993) v1(15.158,146.993) v1(13.148,146.993) v1(10.918,146.993) v4(8.658,146.993) v1(7.558,148.093) v4(6.698,148.953)
R20_NC: K22.12 | length 7.5
  B.Cu w0.8: K22.12@23.998,150.35 K22.12@23.998,157.85
R20_NO: J22.1 K22.14 | length 30.3
  F.Cu w3: J22.1@6.698,156.64 10.671,156.64 10.678,156.633 v1(12.198,156.633) 12.588,156.633 13.805,157.85 13.858,157.85 K22.14@13.858,150.35
  B.Cu w3: J22.1@6.698,156.64 v1(8.468,156.64) v1(10.458,156.64) 12.648,156.64 13.858,157.85 v1(13.858,155.923) v1(13.858,154.283) v1(13.858,153.213) v1(13.858,151.843) K22.14@13.858,150.35
R21_A1: R140.2 U20.5 | length 172.9
  F.Cu w0.254: v2(58.221,297.79) 58.344,297.667 58.344,137.602 59.848,136.098 59.848,133.723 v3(59.85,133.721)
  B.Cu w0.254: R140.2@51.553,297.79 v2(58.221,297.79) ; U20.5@59.823,135.152 59.836,135.139 59.836,133.734 v3(59.85,133.721)
R21_A2: R139.2 U15.2 | length 183.5
  F.Cu w0.254: v3(22.152,138.452) 30.398,146.698 v2(30.398,308.39)
  B.Cu w0.254: U15.2@20.973,137.215 21.046,137.288 21.046,138.008 21.317,138.279 21.886,138.279 22.059,138.452 v3(22.152,138.452) ; v2(30.398,308.39) R139.2@38.473,308.39
R21_COM: J23.2 K23.11 | length 51
  F.Cu w3: K23.11@71.048,300.23 K23.11@71.048,307.73 ; 71.048,308.817 v1(71.988,309.757) v4(73.318,311.087) v4(81.288,311.087) v4(83.248,309.127) J23.2@83.248,306.52
  B.Cu w3: K23.11@71.048,300.23 v1(71.048,301.837) v1(71.048,302.917) v1(71.048,303.967) v1(71.048,305.067) v1(71.048,306.337) 71.048,307.73 71.048,308.817 71.048,308.897 73.238,311.087 v4(73.318,311.087) v1(74.788,311.087) v1(76.798,311.087) v1(79.028,311.087) v4(81.288,311.087) v1(82.388,309.987) v4(83.248,309.127) ; 81.988,310.397 81.988,310.387 v4(83.248,309.127) ; J23.2@83.248,306.52 v4(83.248,309.127)
R21_NC: K23.12 | length 7.5
  B.Cu w0.8: K23.12@66.028,300.26 K23.12@66.028,307.76
R21_NO: J23.1 K23.14 | length 30.3
  F.Cu w3: K23.14@76.088,307.73 76.088,300.23 76.141,300.23 77.358,301.447 v1(77.748,301.447) 79.268,301.447 79.275,301.44 J23.1@83.248,301.44
  B.Cu w3: K23.14@76.088,307.73 v1(76.088,306.237) v1(76.088,304.867) v1(76.088,303.797) v1(76.088,302.157) 76.088,300.23 77.298,301.44 v1(79.488,301.44) v1(81.478,301.44) J23.1@83.248,301.44
R22_A1: R144.2 U20.3 | length 157
  F.Cu w0.254: v2(57.221,282.99) 57.344,282.867 57.344,137.302 58.558,136.088 58.558,133.71 v3(58.556,133.708)
  B.Cu w0.254: R144.2@51.553,282.99 v2(57.221,282.99) ; U20.3@58.523,135.152 58.539,135.136 58.539,133.724 v3(58.556,133.708)
R22_A2: R143.2 U15.4 | length 170.2
  F.Cu w0.254: v3(22.248,135.665) 22.248,137.019 24.159,138.93 24.159,139.175 31.306,146.322 31.306,292.129 31.429,292.252 v2(31.429,293.39)
  B.Cu w0.254: v3(22.248,135.665) 22.248,137.19 U15.4@22.273,137.215 ; v2(31.429,293.39) 31.529,293.49 R143.2@38.473,293.49
R22_COM: J24.2 K24.11 | length 51
  F.Cu w3: K24.11@71.028,285.663 K24.11@71.028,293.163 ; 71.028,294.25 v1(71.968,295.19) v4(73.298,296.52) v4(81.268,296.52) v4(83.228,294.56) J24.2@83.228,291.953
  B.Cu w3: K24.11@71.028,285.663 v1(71.028,287.27) v1(71.028,288.35) v1(71.028,289.4) v1(71.028,290.5) v1(71.028,291.77) K24.11@71.028,293.163 71.028,294.25 71.028,294.33 73.218,296.52 v4(73.298,296.52) v1(74.768,296.52) v1(76.778,296.52) v1(79.008,296.52) v4(81.268,296.52) v1(82.368,295.42) v4(83.228,294.56) ; 81.968,295.83 81.968,295.82 v4(83.228,294.56) ; J24.2@83.228,291.953 v4(83.228,294.56)
R22_NC: K24.12 | length 7.5
  B.Cu w0.8: K24.12@66.028,285.663 K24.12@66.028,293.163
R22_NO: J24.1 K24.14 | length 30.3
  F.Cu w3: K24.14@76.068,293.163 K24.14@76.068,285.663 76.121,285.663 77.338,286.88 v1(77.728,286.88) 79.248,286.88 79.255,286.873 J24.1@83.228,286.873
  B.Cu w3: K24.14@76.068,293.163 v1(76.068,291.67) v1(76.068,290.3) v1(76.068,289.23) v1(76.068,287.59) K24.14@76.068,285.663 77.278,286.873 v1(79.468,286.873) v1(81.458,286.873) J24.1@83.228,286.873
R23_A1: R148.2 U15.3 | length 182.9
  F.Cu w0.254: v3(21.621,136.24) 21.621,137.034 23.705,139.118 23.705,139.363 30.852,146.51 30.852,293.629 30.975,293.752 v2(30.975,306.79)
  B.Cu w0.254: v3(21.621,136.24) 21.621,137.213 U15.3@21.623,137.215 ; v2(30.975,306.79) R148.2@38.473,306.79
R23_A2: R147.2 U20.4 | length 169.7
  F.Cu w0.254: v2(57.767,296.09) 57.798,296.059 57.798,137.49 59.198,136.09 v3(59.198,134.185)
  B.Cu w0.254: R147.2@51.553,296.09 v2(57.767,296.09) ; U20.4@59.173,135.152 59.186,135.14 59.186,134.197 v3(59.198,134.185)
R23_COM: J25.2 K25.11 | length 51
  F.Cu w3: J25.2@6.648,297.51 v4(6.648,294.903) v4(8.608,292.943) v4(16.578,292.943) v1(17.908,294.273) v4(18.848,295.213) ; K25.11@18.848,296.3 K25.11@18.848,303.8
  B.Cu w3: J25.2@6.648,297.51 v4(6.648,294.903) ; 7.908,293.633 7.908,293.643 v4(6.648,294.903) ; K25.11@18.848,303.8 v1(18.848,302.193) v1(18.848,301.113) v1(18.848,300.063) v1(18.848,298.963) v1(18.848,297.693) 18.848,296.3 v4(18.848,295.213) 18.848,295.133 16.658,292.943 v4(16.578,292.943) v1(15.108,292.943) v1(13.098,292.943) v1(10.868,292.943) v4(8.608,292.943) v1(7.508,294.043) v4(6.648,294.903)
R23_NC: K25.12 | length 7.5
  B.Cu w0.8: K25.12@23.998,296.386 K25.12@23.998,303.886
R23_NO: J25.1 K25.14 | length 30.3
  F.Cu w3: J25.1@6.648,302.59 10.621,302.59 10.628,302.583 v1(12.148,302.583) 12.538,302.583 13.755,303.8 13.808,303.8 K25.14@13.808,296.3
  B.Cu w3: J25.1@6.648,302.59 v1(8.418,302.59) v1(10.408,302.59) 12.598,302.59 13.808,303.8 v1(13.808,301.873) v1(13.808,300.233) v1(13.808,299.163) v1(13.808,297.793) K25.14@13.808,296.3
R24_A1: R152.2 U20.7 | length 192.6
  F.Cu w0.254: v2(59.298,315.79) 59.298,138.003 60.911,136.39 v3(61.098,136.39)
  B.Cu w0.254: R152.2@48.998,317.665 50.873,315.79 v2(59.298,315.79) ; v3(61.098,136.39) 61.098,135.177 U20.7@61.123,135.152
R24_A2: R151.2 U20.6 | length 189.9
  F.Cu w0.254: v2(58.721,312.432) 58.798,312.355 58.798,137.79 60.498,136.09 60.498,134.167 v3(60.541,134.124)
  B.Cu w0.254: R151.2@48.998,312.465 56.123,312.465 56.156,312.432 v2(58.721,312.432) ; U20.6@60.473,135.152 60.507,135.118 60.507,134.158 v3(60.541,134.124)
R24_COM: J26.2 K26.11 | length 51
  F.Cu w3: J26.2@6.698,312.16 v4(6.698,309.553) v4(8.658,307.593) v4(16.628,307.593) v1(17.958,308.923) v4(18.898,309.863) ; K26.11@18.898,310.95 K26.11@18.898,318.45
  B.Cu w3: J26.2@6.698,312.16 v4(6.698,309.553) ; 7.958,308.283 7.958,308.293 v4(6.698,309.553) ; K26.11@18.898,318.45 v1(18.898,316.843) v1(18.898,315.763) v1(18.898,314.713) v1(18.898,313.613) v1(18.898,312.343) 18.898,310.95 v4(18.898,309.863) 18.898,309.783 16.708,307.593 v4(16.628,307.593) v1(15.158,307.593) v1(13.148,307.593) v1(10.918,307.593) v4(8.658,307.593) v1(7.558,308.693) v4(6.698,309.553)
R24_NC: K26.12 | length 7.5
  B.Cu w0.8: K26.12@23.998,310.99 K26.12@23.998,318.49
R24_NO: J26.1 K26.14 | length 30.3
  F.Cu w3: J26.1@6.698,317.24 10.671,317.24 10.678,317.233 v1(12.198,317.233) 12.588,317.233 13.805,318.45 13.858,318.45 K26.14@13.858,310.95
  B.Cu w3: J26.1@6.698,317.24 v1(8.468,317.24) v1(10.458,317.24) 12.648,317.24 13.858,318.45 v1(13.858,316.523) v1(13.858,314.883) v1(13.858,313.813) v1(13.858,312.443) K26.14@13.858,310.95
Relay_ADC: J10.4 R86.2 | length 3.4
  B.Cu w0.381: J10.4@48.808,327.14 49.089,327.14 49.954,326.275 R86.2@51.8,326.275
Shift_O\E\: R90.2 U15.13 U16.13 U17.13 U18.13 U19.13 U20.13 | length 55.2
  F.Cu w0.254: v3(22.273,133.765) v3(29.598,133.765) v3(36.898,133.765) v3(45.298,133.765) 52.148,133.765 53.748,132.165 59.171,132.165 v3(59.173,132.167) ; R90.2@36.648,128.79 36.648,129.84 v3(36.873,130.065)
  B.Cu w0.254: U15.13@22.273,131.49 v3(22.273,133.765) ; U17.13@29.573,131.49 29.573,133.74 v3(29.598,133.765) ; v3(36.873,130.065) 36.873,131.44 U16.13@36.923,131.49 36.923,133.74 v3(36.898,133.765) ; U18.13@45.298,131.49 v3(45.298,133.765) ; U19.13@53.173,129.427 53.173,131.592 v3(53.748,132.167) ; U20.13@59.173,129.427 v3(59.173,132.167)
ShiftReg_Latch: R89.2 U15.12 U16.12 U17.12 U18.12 U19.12 U20.12 | length 45.8
  F.Cu w0.254: v3(22.923,132.465) 22.946,132.488 v3(30.223,132.488) v3(37.573,132.488) v3(45.945,132.488) ; R89.2@45.298,131.44 45.298,131.841 v3(45.945,132.488) ; v3(59.823,130.89) v3(53.823,130.89) 53.423,130.89 51.825,132.488 v3(45.945,132.488)
  B.Cu w0.254: U15.12@22.923,131.49 v3(22.923,132.465) ; U17.12@30.223,131.49 v3(30.223,132.488) ; U16.12@37.573,131.49 v3(37.573,132.488) ; v3(45.945,132.488) 45.948,132.485 U18.12@45.948,131.49 ; U19.12@53.823,129.427 v3(53.823,130.89) ; U20.12@59.823,129.427 v3(59.823,130.89)
ShiftRegCLK: R88.2 U15.11 U16.11 U17.11 U18.11 U19.11 U20.11 | length 57
  F.Cu w0.254: v3(23.623,133.115) v3(30.873,133.115) v3(38.223,133.115) v3(46.598,133.115) 51.848,133.115 53.423,131.54 v3(60.473,131.54) ; R88.2@53.423,128.89 59.898,128.89 60.448,128.34 v2(60.448,128.14)
  B.Cu w0.254: U15.11@23.573,131.49 23.573,133.065 v3(23.623,133.115) ; U17.11@30.873,131.49 v3(30.873,133.115) ; U16.11@38.223,131.49 v3(38.223,133.115) ; U18.11@46.598,131.49 v3(46.598,133.115) ; U19.11@54.473,129.427 v3(54.473,131.538) ; v2(60.448,128.14) 60.448,129.402 U20.11@60.473,129.427 v3(60.473,131.54)
ShiftRegDATA: R87.2 U15.14 | length 2.9
  F.Cu w0.254: v3(21.648,129.39) 22.103,128.935 R87.2@22.103,128.79
  B.Cu w0.254: U15.14@21.623,131.49 21.648,131.465 v3(21.648,129.39)
pads on no net: H5.Un1 H6.Un1 H7.Un1 H8.Un1 U20.9

## Polygon pours and split planes (outlines as drawn)
GND on F.Cu "F.Cu--2" (solid, remove dead copper, pour order 11): 28.698,331.39 29.098,331.79 60.798,331.79 61.198,331.39 61.198,126.79 60.798,126.39 29.099,126.39 28.699,126.791
GND on F.Cu "F.Cu--3" (solid, remove dead copper, pour order 10): 63.648,140.99 64.648,139.99 64.648,127.39 63.648,126.39 17.748,126.39 16.748,127.39 16.748,139.969 17.769,140.968
GND on F.Cu "F.Cu--1" (solid, remove dead copper, pour order 9): 83.798,324.19 84.198,323.79 84.198,317.89 83.798,317.49 57.398,317.49 56.998,317.89 56.998,323.784 57.404,324.184
+12V on F.Cu "F.Cu-" (solid, remove dead copper, pour order 6): 47.698,328.39 47.698,329.291 48.097,329.691 83.89,329.789 84.291,329.382 84.205,324.583 83.804,324.191 48.097,324.266 47.698,324.666
GND on B.Cu "B.Cu--2" (solid, remove dead copper, pour order 12): 29.097,331.386 29.502,331.785 60.802,331.395 61.197,330.994 60.799,126.794 60.394,126.395 29.095,126.786 28.7,127.187
GND on B.Cu "B.Cu--3" (solid, remove dead copper, pour order 8): 63.594,140.012 64.571,138.939 63.718,127.336 62.699,126.41 17.803,127.367 16.827,128.442 17.696,140.002 18.737,140.926
GND on B.Cu "B.Cu--1" (solid, remove dead copper, pour order 7): 83.778,323.796 84.171,323.371 83.822,317.87 83.417,317.495 57.418,317.884 57.025,318.309 57.379,323.798 57.79,324.172
+12V on B.Cu "B.Cu-" (solid, remove dead copper, pour order 5): 47.698,328.33 47.716,328.447 48.009,329.406 48.395,329.688 83.855,329.385 84.25,328.948 83.839,324.558 83.435,324.195 48.095,324.661 47.7,325.063

## Keep-outs
Keep-Out Layer:
  the board outline again, w0.254

## Silkscreen, mask and mechanical layers (free items; w line width, h text height)
F.SilkS:
  text "KNX_Relay_24CH_v1.2" at 70.1,127.4 h3
Edge.Cuts:
  circle w0.254: c22.998,144.14 r1.75
  circle w0.254: c69.998,133.64 r1.75
  circle w0.254: c69.998,314.14 r1.75
  circle w0.254: c19.998,324.64 r1.75
  lines w0.254: 2.498,126.39 87.498,126.39 87.498,331.89 2.498,331.89 2.498,126.39 ; 25.698,146.99 29.098,146.99 29.098,323.09 25.698,323.09 25.698,146.99 ; 60.998,137.19 64.398,137.19 64.398,311.19 60.998,311.19 60.998,137.19